# Altium PCB Race_Province.pcbdoc (part 1 of 2)
Units mil, origin at the board's own origin, x right, y up, seen from the top; angles counter-clockwise.
Board outline 6815.59 x 4255 mil, 2 copper layers (Top Layer, Bottom Layer); 128 components, 101 nets, 458 pads, 264 vias.
Unrouted connection lines stored in the file: 95.
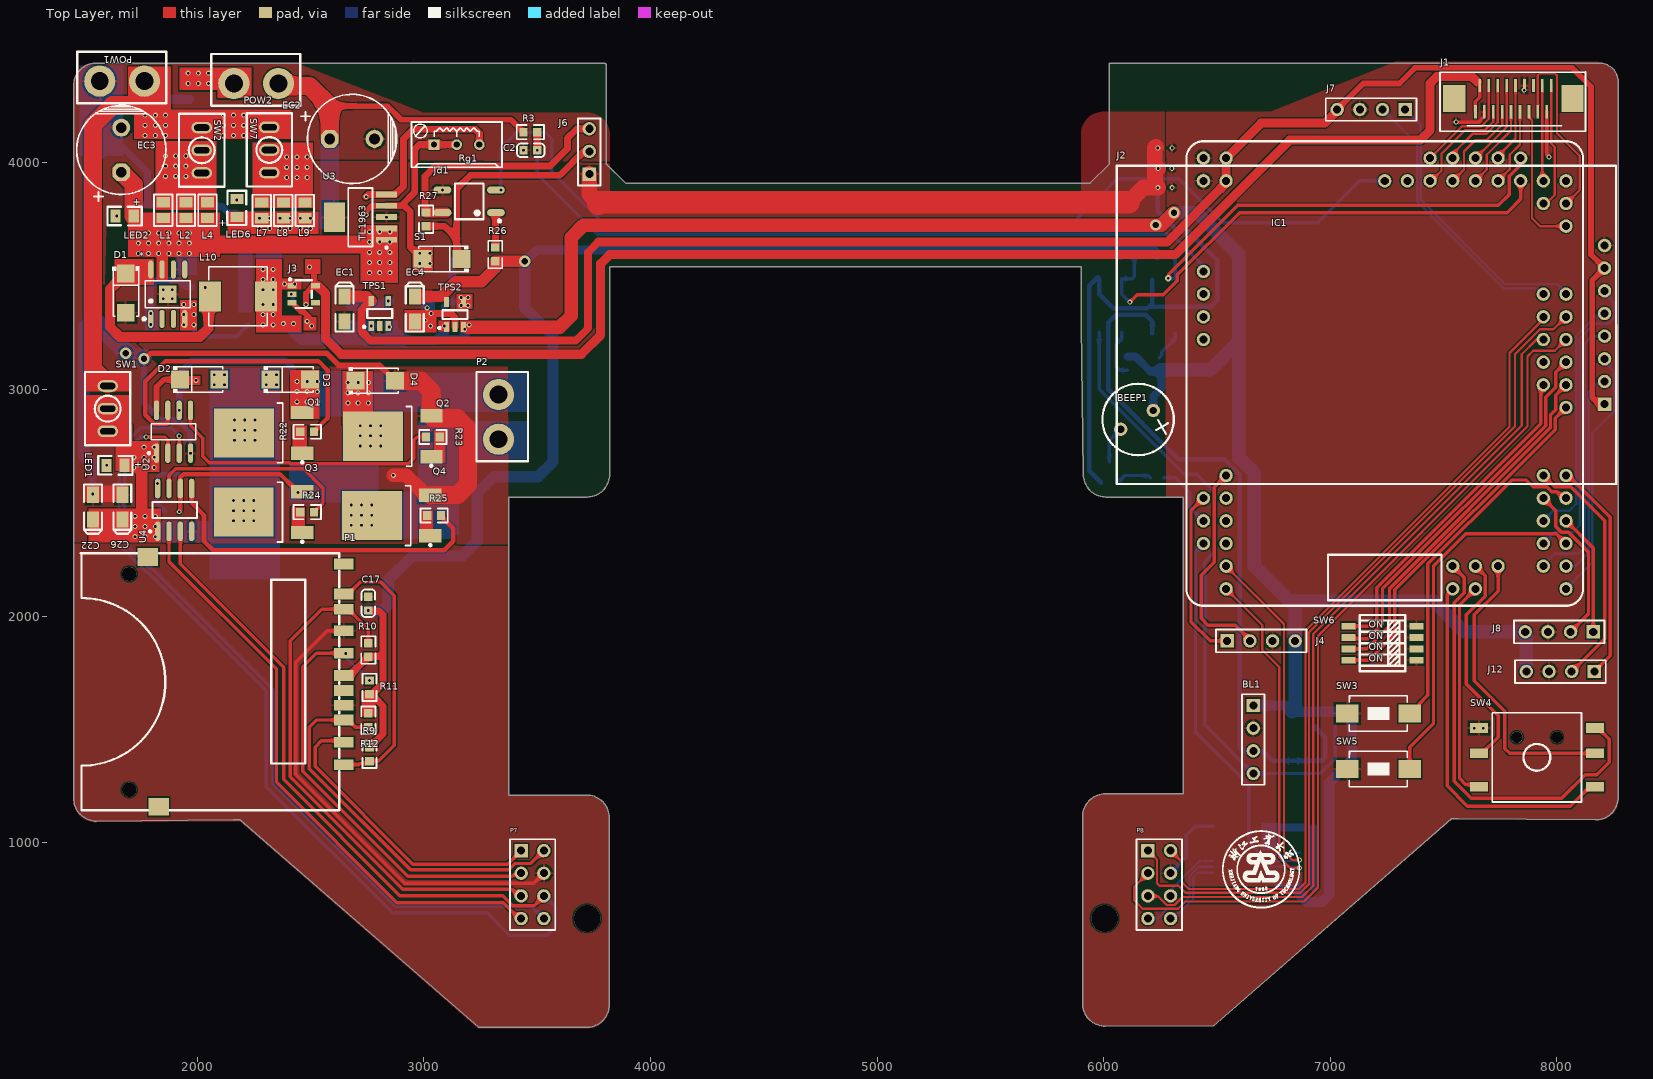
[diagram p0: Top Layer view]
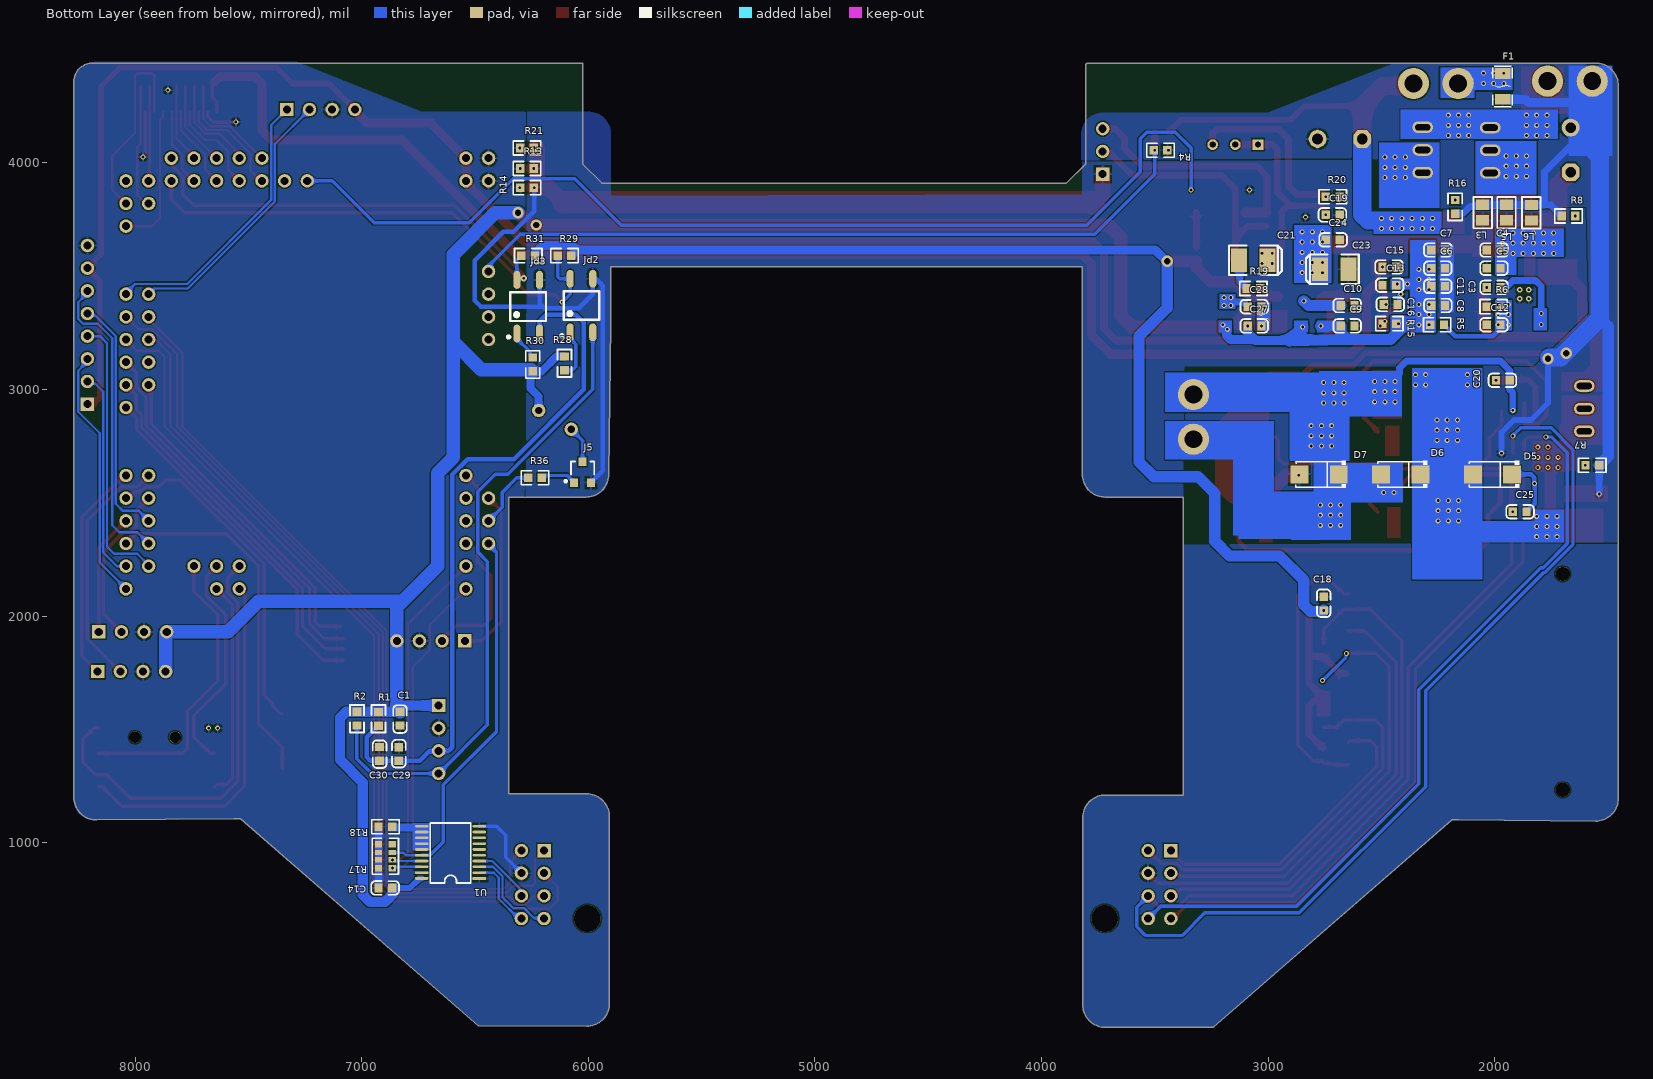
[diagram p1: Bottom Layer view, seen from below]
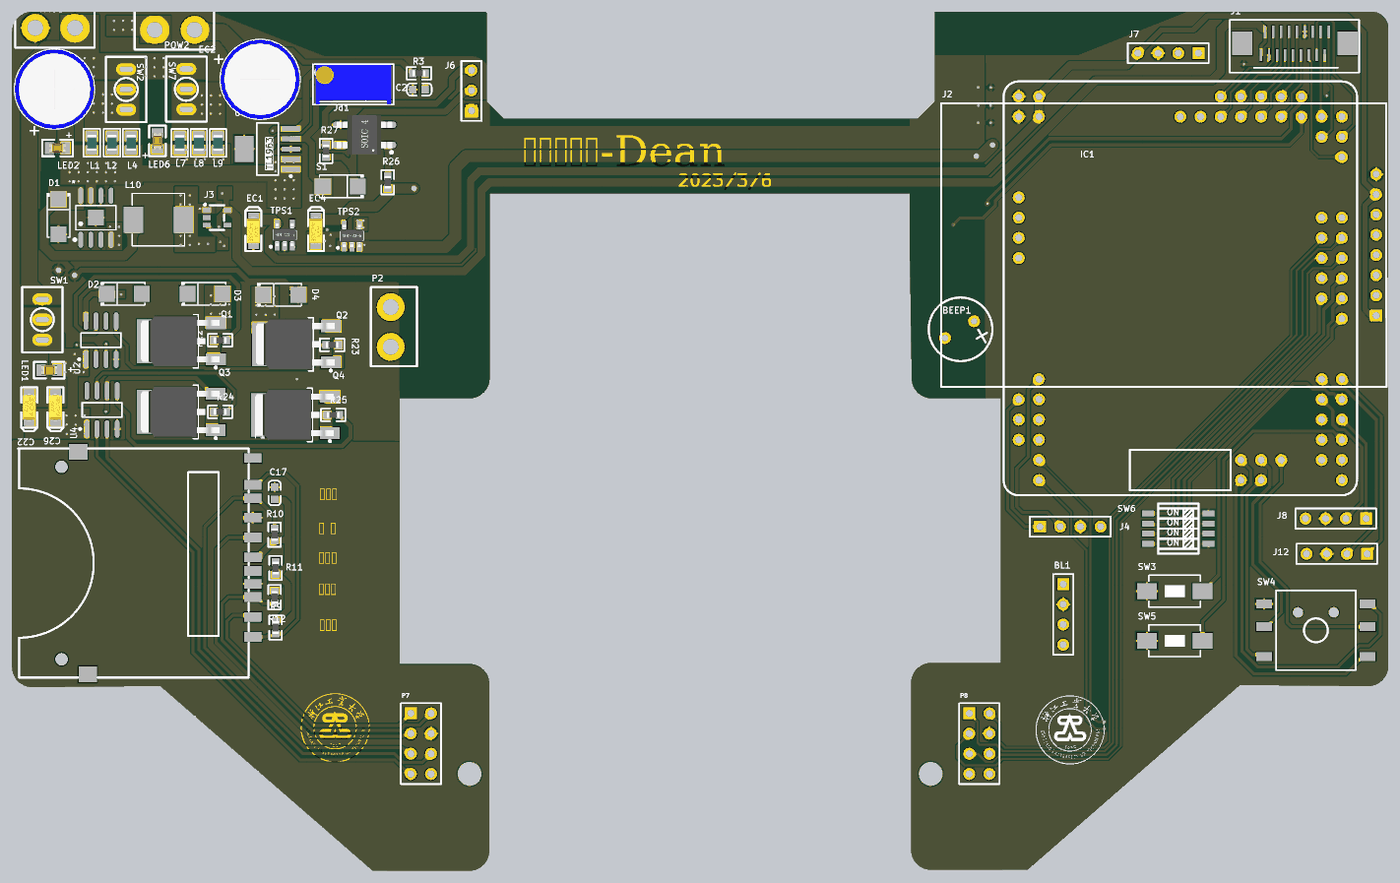
[diagram p2: 3D render of the assembled board from above, using the file's embedded part models]
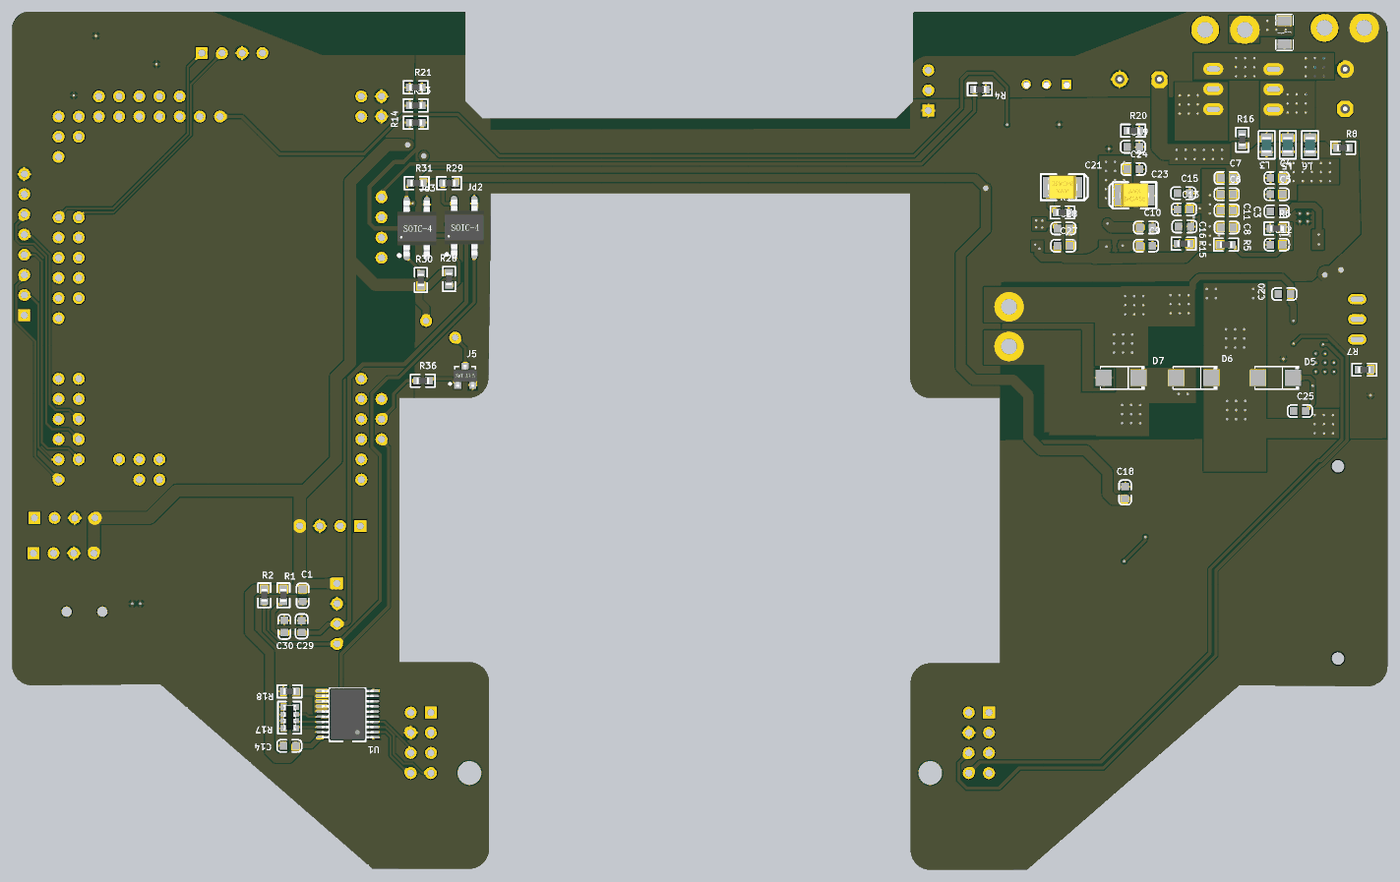
[diagram p3: 3D render of the assembled board from below, using the file's embedded part models]

## Layer stack, top to bottom
Top Solder: solder mask 0.4, Solder Resist, Dk 3.5
Top Layer: signal copper 1.4
Dielectric 1: dielectric 12.6, FR-4, Dk 4.8
Bottom Layer: signal copper 1.4
Bottom Solder: solder mask 0.4, Solder Resist, Dk 3.5

## Board outline
2160,1100 2190,1100 3240.68,186.03 3718.22,185 ccw(c3718.22,285) 3818.22,285 3818.22,1110 ccw(c3718.22,1110) 3718.22,1210 3375,1210 3375,2525 3720,2525 ccw(c3720,2625) 3820,2625 3820,3540 5900,3540 5900,3285 5910,2625 ccw(c6010,2625) 6010,2525 6350,2525 6350,1215 6006.78,1215 ccw(c6006.78,1115) 5906.78,1115 5906.78,290 ccw(c6006.78,290) 6006.78,190 6484.32,191.03 7535,1105 7565,1105 8170,1100 ccw(c8170,1200) 8270,1200 8270,4345 ccw(c8185,4355) 8195,4440 6025,4440 6025,3995 5940,3910 3890,3910 3805,3995 3805,4435 3800,4440 1555,4440 ccw(c1555,4340) 1455,4340 1455,1195 ccw(c1555,1195) 1555,1095
cut-out: 2955,4455

## Design rules (kind name [scope] priority, off if disabled: settings)
Clearance [All] p1: gap=6 ignorepadtopadclearanceinfootprint=FALSE
ComponentClearance [All] p1: gap=0 collisioncheckmode=3 verticalgap=0 showdistances=FALSE
PolygonConnect [All] p1: connectstyle=Relief reliefconductorwidth=10 reliefentries=4 polygonreliefangle="90 Angle" airgapwidth=10
RoutingVias [All] p1: holewidth=12 width=28 viastyle="Through Hole" minholewidth=10 minwidth=10 maxholewidth=200 maxwidth=200
SolderMaskExpansion [All] p1: expansion=4 istentingtop=FALSE
Width [All] p1: maxlimit=100 minlimit=10 preferedwidth=10
29 further rules are at their usual default settings.

## Classes and differential pairs
net class "New Class": DGND GND PGND
net class VCC: EN_MOTOR MOTOR_EN V-SERVO V_FUTUBA VCC3.3_all VCC3.3_ITEM VCC3.3_MCU VCC5.0-ALL VCC11.2 VCC11.2-M VCC11.2_Edge

## Components (designator, comment, footprint, x,y, rotation, side; value= is the part's Value field where it differs from the comment)
* "TPS5430DDAR" SOIC-8_L5.0-W4.0-P1.27-LS6.0-BL-EP2.0 1870,3420 r0 top
BEEP1 "BEEP" BEEP 6120,2850 r210 top
BL1 "Encoder" HDR1X4_2.54_4pin 6660,1605 r270 top
C1 "1uf" 0603_C 6830.75,1546.81 r180 bottom
C2 "100nf" 0603_C 3470.32,4055 r90 top
C3 "100nf" 0603_C 2005,3450 r90 bottom
C4 "10uf" 0603_C 2004.68,3615 r90 bottom
C5 "10uf" 0603_C 2005,3535 r90 bottom
C6 "47uf" 0603_C 2250,3535 r270 bottom
C7 "47uf" 0603_C 2249.69,3615 r270 bottom
C8 "47uf" 0603_C 2249.69,3370 r270 bottom
C9 "0.1uF（104）" 0603_C 2649.69,3280 r270 bottom
C10 "10nF" 0603_C 2649.69,3370 r270 bottom
C11 "47uf" 0603_C 2250,3455 r270 bottom
C12 "470pf" 0603_C 2005,3285 r90 bottom
C13 "1UF" 0603_C 2465,3460 r90 bottom
C14 "Cap" 0603_C 6895,800 r270 bottom value=0.1uF
C15 "1UF" 0603_C 2465.32,3540 r270 bottom
C16 "100nf" 0603_C 2459.69,3375 r270 bottom
C17 "Cap" 0603_C 2755,2055 r180 top value=0.1uF
C18 "Cap" 0603_C 2755,2055 r0 bottom value=0.1uF
C19 "104" 0603_C 2715,3770 r270 bottom
C20 "Cap" 0603_C 1964.69,3040 r270 bottom value=1.5uF
C21 "22uF" CASE-B_3528 3065,3570 r180 bottom
C22 "Cap-Pol" CAP-3216 1540,2480 r270 top value=10uF
C23 "22uF" CASE-B_3528 2707.99,3530 r0 bottom
C24 "104" 0603_C 2715,3660 r90 bottom
C25 "Cap" 0603_C 1890,2460 r90 bottom value=1.5uF
C26 "Cap-Pol" CAP-3216 1670,2480 r270 top value=10uF
C27 "0.1uF（104）" 0603_C 3060,3280 r270 bottom
C28 "10nF" 0603_C 3060,3365 r270 bottom
C29 "47pf" 0603_C 6835.75,1391.18 r0 bottom
C30 "47pf" 0603_C 6920.75,1391.81 r180 bottom
D1 "SS34" SMA_L4.3-W2.6-LS5.2-RD 1685,3425 r270 top
D2 "1N5819" SMA_L4.3-W2.6-LS5.2-RD 2010.55,3043.11 r0 top
D3 "1N5819" SMA_L4.3-W2.6-LS5.2-RD 2410.55,3043.11 r0 top
D4 "1N5819" SMA_L4.3-W2.6-LS5.2-RD 2785.55,3038.11 r0 top
D5 "1N5819" SMA_L4.3-W2.6-LS5.2-RD 2010,2625 r0 bottom
D6 "1N5819" SMA_L4.3-W2.6-LS5.2-RD 2415,2625 r0 bottom
D7 "1N5819" SMA_L4.3-W2.6-LS5.2-RD 2775,2625 r0 bottom
EC1 "10uF" CAP-3216 2650,3355 r90 top
EC2 "470uF" C-RB-5.0/10 2683.43,4105 r0 top
EC3 "470uF" C-RB-5.0/10 1665,4056.57 r90 top
EC4 "10uF" CAP-3216 2960,3355 r90 top
F1 "FUSE 2A" F1206 1965,4336.9 r90 bottom
IC1 "TC264/364" TC264 6440,4020 r0 top
J1 "MT9V032" FPC18pin-L 7812.67,4288.63 r0 top
J2 "TFT" TFT 8210,2935 r90 top
J3 "ME6211C33M5G" SOT-23-5_L3.0-W1.7-P0.95-LS2.8-BR 2470,3420 r180 top
J4 "Ultrasound" HDR1X4_2.54_4pin 6545,1890 r0 top
J5 "S8050" SOT23-3 6025,2635 r180 bottom
J6 "Direction_PWM" HDR1X3_2.54 4160,4095 r90 top
J7 "IIC" HDR1X4_2.54_4pin 7330,4235 r180 top
J8 "Ultrasound" HDR1X4_2.54_4pin 8160,1930 r180 top
J12 "Ultrasound" HDR1X4_2.54_4pin 8165,1755 r180 top
Jd1 "TL" LC-SOP-4_P2.54 3200,3830 r180 top
Jd2 "TL" LC-SOP-4_P2.54 6030,3370 r90 bottom
Jd3 "TL" LC-SOP-4_P2.54 6265,3365 r90 bottom
L1 "10uH" 0805_L 1850,3790.55 r270 top
L2 "10uH" 0805_L 1950,3790.55 r270 top
L3 "10uH" 0805_L 2053.62,3780 r90 bottom
L4 "10uH" 0805_L 2045,3790.55 r270 top
L5 "10uH" 0805_L 1948.62,3780 r90 bottom
L6 "10uH" 0805_L 1838.62,3779.45 r90 bottom
L7 "10uH" 0805_L 2285,3790 r270 top
L8 "10uH" 0805_L 2380,3790 r270 top
L9 "10uH" 0805_L 2475,3790 r270 top
L10 "10uH" IND-SMD_L7.1-W6.6 2180,3410 r180 top
LED1 "LED" 0805_LED 1679.25,2665 r180 top
LED2 "LED" 0805_LED 1720,3765 r180 top
LED6 "LED" 0805_LED 2175,3760 r90 top
P1 "Header 9H" SD-large 2155,1700 r180 top
P2 "KF/WJ/DG 30x connecter" CON2_2 3330,2885 r90 top
P7 "Header 4X2" HDR2X4_CEN_2.54mm_8pin 3429.65,965 r270 top
P8 "Header 4X2" HDR2X4_CEN_2.54mm_8pin 6195,965 r270 top (schematic designator P7)
POW1 "POWER" "CON2 - duplicate" 1668.43,4355 r0 top
POW2 "Edgeboard" "CON2 - duplicate" 2260,4345 r0 top
Q1 "IRLR7843" TO-252AA_M 2290.55,2808.11 r180 top
Q2 "IRLR7843" TO-252AA_M 2860.2,2793.11 r180 top
Q3 "IRLR7843" TO-252AA_M 2290.2,2458.11 r180 top
Q4 "IRLR7843" TO-252AA_M 2855.55,2443.11 r180 top
R1 "10k" 0603_R 6925.75,1546.49 r90 bottom
R2 "10k" 0603_R 7020.75,1546.81 r90 bottom
R3 "100k" 0603_R 3470,4135 r0 top
R4 "33K" 0603_R 3475,4055 r180 bottom
R5 "62K" 0603_R 2254.68,3285 r0 bottom
R6 "20K" 0603_R 2005,3365 r180 bottom
R7 "1K5" 0603_R 1569.57,2665 r180 bottom
R8 "1K5" 0603_R 1674.68,3765 r0 bottom
R9 "10K" 0603_R 2760,1390 r270 top
R10 "10K" 0603_R 2755,1850 r90 top
R11 "10K" 0603_R 2760,1685 r90 top
R12 "10K" 0603_R 2755,1540 r270 top
R13 "0K" 0603_R 6270.31,3975 r0 bottom
R14 "0K" 0603_R 6270.31,3890 r0 bottom
R15 "1K" 0603_R 2465,3290 r0 bottom
R16 "1K5" 0603_R 2175,3805 r270 bottom
R17 "Res Pack" LC-0603_Rx4 6895,940 r90 bottom value=1K
R18 "4K7" 0603_R 6895,1070 r0 bottom
R19 "1" 0603_R 3065,3445 r180 bottom
R20 "1k" 0603_R 2715,3850 r180 bottom
R21 "0K" 0603_R 6270.31,4065 r0 bottom
R22 "Res1" 0603_R 2485.24,2813.11 r0 top value=20R
R23 "Res1" 0603_R 3040,2790 r180 top value=20R
R24 "Res1" 0603_R 2485.24,2458.11 r0 top value=20R
R25 "Res1" 0603_R 3045.24,2443.11 r0 top value=20R
R26 "100" 0603_R 3315,3595.32 r270 top
R27 "2k" 0603_R 3010,3750.32 r270 top
R28 "180" 0603_R 6105,3115 r90 bottom
R29 "2k" 0603_R 6105,3590 r180 bottom
R30 "180" 0603_R 6245,3110 r270 bottom
R31 "2k" 0603_R 6265,3590 r180 bottom
R36 "4K7" 0603_R 6235,2610 r0 bottom
Rg1 "10k" "VR-3296W - duplicate" 3145,4080 r0 top
S1 "1N5819" SMA_L4.3-W2.6-LS5.2-RD 3080,3575 r180 top
SW1 "SW" 钮子开关-小 1606.89,2908.58 r0 top
SW2 "SW" 钮子开关-小 2018.11,4061.42 r180 top
SW3 "SW_PB" SW_PB 7210,1570 r270 top
SW4 "KEY_5" KEY_5 7655.51,1506.34 r0 top
SW5 "SW_PB" SW_PB 7210,1325 r270 top
SW6 "SW_DIP_4" SW-SMD_8P-L6.3-W4.5-P1.27-LS8.1 7230,1880 r90 top
SW7 "SW" 钮子开关-小 2320,4050 r0 top
TPS1 "TPS73633" SOT-23-5 2805,3335 r270 top
TPS2 "TPS73633" SOT-23-5 3137.4,3329.88 r270 top
U1 "74HC245" TSSOP20 6480.91,842.05 r0 bottom
U2 "IR2104S" SO-8_N 1895.55,2813.11 r90 top
U3 "TL1963" TL1963 2715,3740 r270 top
U4 "IR2104S" SO-8_N 1900.55,2468.11 r90 top

## Footprints (in the part's own frame and the unit in brackets; to place one, negate y for a bottom-side part, rotate by r counter-clockwise, add the part's x,y. Pads: shape width x height; smd on the part's side, far side on the other; paste and mask are expansions set on the pad)
0603_C [mm]
  rect 0.98x0.93 smd: 1(0,-0.77) 2(0,0.77)
  silkscreen extent -0.76,-1.59 0.76,1.51
0603_R [mm]
  rect 0.93x0.98 smd: 1(-0.77,0) 2(0.77,0)
  silkscreen extent -1.54,-0.79 1.54,0.79, body extent -0.8,-0.4 0.8,0.4, height 0.38
0805_L [mm]
  rect 1.16x1.47 smd: 1(-0.875,0) 2(0.875,0)
  silkscreen extent -1.76,-1.04 1.76,1.03, body extent -1,-0.6 1,0.6, height 0.95
0805_LED [mil] "1/8W"
  rect 45x58 smd: 1(0,0) 2(80,0.2)
  silkscreen extent -35,-41 116,42, body extent 0,-25 80,25, height 43
BEEP [mm]
  round 1.5 hole 0.8: 1(-2.896,0) 2(1.318,0)
  silkscreen extent -4.91,-3.97 3.09,4.03
C-RB-5.0/10 [mm] "插件电解电容"
  oct 2x2 hole 1.2: 1(-2.5,0)
  round 2 hole 1.2: 2(2.5,0)
  silkscreen extent -5.71,-5 5,5, body extent -5.03,-5.03 5.03,5.03, height 13.03
CAP-3216 [mm]
  rect 1.8x1.35 smd: 1(1.4,0) 2(-1.4,0)
  silkscreen extent -2.54,-1 2.97,1, body extent -1.7,-0.84 1.7,0.84, height 1.71
CASE-B_3528 [mm]
  rect 1.8x2.6 smd: 1(1.6,0) 2(-1.6,0)
  silkscreen extent -2.73,-1.65 3.16,1.65, body extent -1.85,-1.47 1.85,1.46, height 2.03
"CON2 - duplicate" [mm]
  round 3.5 hole 2: 1(-2.5,0.127) 2(2.5,0.127)
  silkscreen extent -5.03,-2.36 4.95,3.43
CON2_2 [mm]
  round 3.5 hole 2: 1(2.333,0) 2(-2.667,0)
  silkscreen extent -5.12,-3.3 4.86,2.49
F1206 [mil]
  rect 46.9x68 smd mask+2: 1(-56.9,0) 2(56.9,0)
  silkscreen extent -89,-43 89,43
FPC18pin-L [mm] "立式"
  rect 2.5x3 smd: 0(-6.764,-0.143) 0(6.494,-0.143)
  rect 0.305x1.5 smd: 1(4.115,1.33) 2(3.615,-1.616) 3(3.115,1.33) 4(2.615,-1.616) 5(2.115,1.33) 6(1.615,-1.616) 7(1.115,1.33) 8(0.615,-1.616) 9(0.115,1.33) 10(-0.385,-1.616) 11(-0.885,1.33) 12(-1.385,-1.616) 13(-1.885,1.33) 14(-2.385,-1.616) 15(-2.885,1.33) 16(-3.385,-1.616) 17(-3.885,1.33) 18(-4.385,-1.616)
  silkscreen extent -8.34,-3.8 7.94,2.83
HDR1X3_2.54 [mm]
  rect 1.5x1.5 hole 0.9: 1(-3.683,10.922)
  round 1.5 hole 0.9: 2(-1.143,10.922) 3(1.397,10.922)
  silkscreen extent -4.95,9.65 2.54,12.19
HDR1X4_2.54_4pin [mm] "4pin"
  rect 1.5x1.5 hole 0.9: 1(0,0)
  round 1.5 hole 0.9: 2(2.54,0) 3(5.08,0) 4(7.62,0)
  silkscreen extent -1.27,-1.27 8.89,1.27
HDR2X4_CEN_2.54mm_8pin [mm] "蓝牙"
  rect 1.5x1.5 hole 0.9: 1(0,0)
  round 1.5 hole 0.9: 2(2.54,0) 3(5.08,0) 4(7.62,0) 5(0,2.54) 6(2.54,2.54) 7(5.08,2.54) 8(7.62,2.54)
  silkscreen extent -1.27,-1.27 8.89,3.81
IND-SMD_L7.1-W6.6 [mm]
  rect 2.474x3.32 smd mask+0.051: 1(3.153,0) 2(-3.153,0)
  silkscreen extent -3.3,-3.3 3.3,3.3
KEY_5 [mm] "五向导航按键"
  round 1.3 hole 1.3: 0(4.25,-1.05) 0(8.75,-1.05)
  rect 2x1.1 smd: 1(0,0) 2(0,-2.85) 3(0,-6.6) 4(13,0) 5(13,-2.85) 6(13,-6.6)
  silkscreen extent 1.5,-8.3 11.5,1.7
LC-0603_Rx4 [mm]
  rect 0.75x0.8 smd mask+0.051: 1(-1.35,-0.77) 4(1.35,-0.77) 5(1.35,0.77) 8(-1.35,0.77)
  rect 0.58x0.8 smd mask+0.051: 2(-0.4,-0.77) 3(0.4,-0.77) 6(0.4,0.77) 7(-0.4,0.77)
  silkscreen extent -2.02,-1.47 2.02,1.47, body extent -1.6,-0.8 1.6,0.8, height 0.55
LC-SOP-4_P2.54 [mm]
  oval 2x0.8 smd: 1(-3,1.27) 2(-3,-1.27) 3(3,-1.27) 4(3,1.27)
  silkscreen extent -3.55,-2 1.6,2.35, body extent -3.5,-2.45 3.5,2.45, height 2.9
SD-large [mm]
  rect 2.2x1.2 smd: 1(-12.495,6.541) 2(-12.495,4.04) 3(-12.495,2.389) 4(-12.495,-0.961) 5(-12.495,-3.459) 6(-12.495,-5.96) 7(-12.495,-8.389) 8(-12.495,9.039) 9(-12.495,-10.09) ""(-12.495,0.741) ""(-12.495,-13.439)
  rect 2.3x2 smd: ""(8.254,13.76) ""(9.455,-14.24)
  round 1.6 hole 1.6 unplated: ""(11.556,-12.34) ""(11.556,11.86)
  silkscreen extent -12,-14.64 17.02,14.16
SMA_L4.3-W2.6-LS5.2-RD [mm]
  rect 2x2 smd mask+0.051: 1(-2.2,0) 2(2.2,0)
  silkscreen extent -2.98,-1.5 2.6,1.5
SO-8_N [mm] "SOIC, 8-Leads, Body 4.9x3.9mm, Pitch 1.27mm, IPC Medium Density"
  oval 2.2x0.6 smd: 1(-2.4,1.905) 2(-2.4,0.635) 3(-2.4,-0.635) 4(-2.4,-1.905) 5(2.4,-1.905) 6(2.4,-0.635) 7(2.4,0.635) 8(2.4,1.905)
  silkscreen extent -2.52,-2.5 0.9,2.88, body extent -1.95,-2.45 1.95,2.45, height 1.75
SOIC-8_L5.0-W4.0-P1.27-LS6.0-BL-EP2.0 [mil]
  oval 22.6x80.2 smd mask+2: 1(-75,-109) 2(-25,-109) 3(25,-109) 4(75,-109) 5(75,109) 6(25,109) 7(-25,109) 8(-75,109)
  rect 78.7x78.7 smd mask+2: 9(0,0)
  silkscreen extent -110,-115 100,60
SOT23-3 [mm] "S8050_晶体管"
  rect 0.9x0.95 smd: 1(-0.95,-1.175) 2(0.95,-1.175) 3(0,1.175)
  silkscreen extent -2.03,-1.14 1.3,1.18, body extent -1.45,-1.4 1.45,1.4, height 1.2
SOT-23-5 [mm]
  rect 1.1x0.6 smd: 1(1.4,-0.95) 2(1.4,0) 3(1.4,0.95) 4(-1.4,0.95) 5(-1.4,-0.95)
  silkscreen extent -0.5,-1.87 1.62,1.4, body extent -1.4,-1.45 1.4,1.45, height 1.2
SOT-23-5_L3.0-W1.7-P0.95-LS2.8-BR [mm]
  rect 1x0.6 smd mask+0.051: 1(1.3,-0.95) 2(1.3,0) 3(1.3,0.95) 4(-1.3,0.95) 5(-1.3,-0.95)
  silkscreen extent -0.9,-1.78 1.65,1.55
SW-SMD_8P-L6.3-W4.5-P1.27-LS8.1 [mil]
  rect 30x60 smd mask+2: 1(-75,-150) 2(-25,-150) 3(25,-150) 4(75,-150) 5(75,150) 6(25,150) 7(-25,150) 8(-75,150)
  silkscreen extent -124,-100 124,100
SW_PB [mm] "按键"
  rect 2x2.5 smd: 1(0,3.556) 2(0,-3.444)
  silkscreen extent -2,-3.19 2,3.31, body extent -1.93,-3.94 1.92,3.95, height 2.5
TC264 [mm] "TC264核心板"
  round 1.5 hole 0.9: 1(0,0) 2(2.54,0) 3(0,-2.54) 4(2.54,-2.54) 11(0,-12.7) 13(0,-15.24) 15(0,-17.78) 17(0,-20.32) 30(2.54,-35.56) 31(0,-38.1) 32(2.54,-38.1) 33(0,-40.64) 34(2.54,-40.64) 35(0,-43.18) 36(2.54,-43.18) 38(2.54,-45.72) 40(2.54,-48.26) 49(27.94,-45.72) 50(27.94,-48.26) 51(30.48,-45.72) 52(30.48,-48.26) 53(33.02,-45.72) 58(40.64,-48.26) 59(38.1,-45.72) 60(40.64,-45.72) 61(38.1,-43.18) 62(40.64,-43.18) 63(38.1,-40.64) 64(40.64,-40.64) 65(38.1,-38.1) 66(40.64,-38.1) 67(38.1,-35.56) 68(40.64,-35.56) 74(40.64,-27.94) 75(38.1,-25.4) 76(40.64,-25.4) 77(38.1,-22.86) 78(40.64,-22.86) 79(38.1,-20.32) 80(40.64,-20.32) 81(38.1,-17.78) 82(40.64,-17.78) 83(38.1,-15.24) 84(40.64,-15.24) 90(40.64,-7.62) 91(38.1,-5.08) 92(40.64,-5.08) 93(38.1,-2.54) 94(40.64,-2.54) 97(35.56,-2.54) 98(35.56,0) 99(33.02,-2.54) 100(33.02,0) 101(30.48,-2.54) 102(30.48,0) 103(27.94,-2.54) 104(27.94,0) 105(25.4,-2.54) 106(25.4,0) 107(22.86,-2.54) 109(20.32,-2.54)
  silkscreen extent -1.91,-50.16 42.55,1.91
TFT [mm] "4pin"
  rect 1.5x1.5 hole 0.9: 1(0,0)
  round 1.5 hole 0.9: 2(2.54,0) 3(5.08,0) 4(7.62,0) 5(10.16,0) 6(12.7,0) 7(15.24,0) 8(17.78,0)
  silkscreen extent -8.97,-1.3 26.72,54.69
TL1963 [mm]
  rect 0.65x2.35 smd: 1(2.032,3.052) 2(0.762,3.052) 3(-0.508,3.052) 4(-1.778,3.052) 5(-3.048,3.052)
  rect 3.3x2.35 smd: 6(-0.508,-2.798)
  silkscreen extent -3.78,-1.22 3.03,3.18, body extent -3.78,-1.65 2.77,1.9, height 1.8
TO-252AA_M [mm] "D-PAK, 4-Leads, Body 6.1x6.5mm, Pitch 2.28mm, Lead Span 9.8mm, IPC Low Density"
  rect 2.5x1.5 smd: 1(-4.4,2.28) 3(-4.4,-2.28)
  rect 6.7x5.5 smd: 4(2.15,0)
  silkscreen extent -4.52,-3.35 -1.6,3.43, body extent -4.9,-3.27 5.04,3.27, height 2.39
TSSOP20 [mm] "74HC245"
  rect 1.5x0.3 smd: 1(0,0)
  oval 1.5x0.3 smd: 2(0,-0.65) 3(0,-1.3) 4(0,-1.95) 5(0,-2.6) 6(0,-3.25) 7(0,-3.9) 8(0,-4.55) 9(0,-5.2) 10(0,-5.85) 11(6.454,-5.85) 12(6.454,-5.2) 13(6.454,-4.55) 14(6.454,-3.9) 15(6.454,-3.25) 16(6.454,-2.6) 17(6.454,-1.95) 18(6.454,-1.3) 19(6.454,-0.65) 20(6.454,0)
  silkscreen extent 0.97,-6.2 5.49,0.51, body extent -0.05,-6.22 6.5,0.38, height 1.2
"VR-3296W - duplicate" [mm] "Potentiometer; 3 Leads"
  rect 1.2x1.2 hole 0.7: 1(-2.54,0)
  round 1.2 hole 0.7: 2(0,0) 3(2.54,0)
  silkscreen extent -5.08,-2.54 5.08,2.54, body extent -4.75,-2.54 4.75,2.46, height 11.5
钮子开关-小 [mm]
  oval 2.3x1.3 hole 0.7 slot 1.7 at 0 deg: 1(-0.048,-2.377) 2(-0.048,0.163) 3(-0.048,2.703)
  silkscreen extent -2.59,-3.94 2.49,4.26

## Part data
BEEP1: "有源5v蜂鸣器"
BL1: "编码器"
C1 C4 C5 C6 C7 C8 C9 C10 C11 C12 C13 C15 C16 C27 C28 C29 C30: library part CAP, "电容"
C2 C3: library part CAP, "0805"
C14 C17 C18 C20 C25: "Capacitor", LatestRevisionDate=17-Jul-2002, LatestRevisionNote="Re-released for DXP Platform.", PackageDescription="Radial Cap, Thru-Hole; 2 Leads; 0.3 in Pin Spacing", PackageReference=RAD-0.3, Published=8-Jun-2000, Publisher="Altium Limited"
C19 C24: library part Cap, "Capacitor", LatestRevisionDate=17-Jul-2002, LatestRevisionNote="Re-released for DXP Platform.", Published=8-Jun-2000, Publisher="Altium Limited"
C21 C23: library part ELECTRO2_1, "Electrolytic Capacitor"
C22 C26: library part Cap-Pol-A, "钽电容", LatestRevisionDate=17-Jul-2002, LatestRevisionNote="Re-released for DXP Platform.", PackageReference=RB7.6-15, Published=8-Jun-2000, Publisher="Altium Limited"
D1: library part 1N5819, "1N5819 二极管 Diode", Imax=500mA, Price(RMB)=0.000, Published=8-Jun-2000, Publisher="Altium Limited", Revision="July-2002: Re-released for DXP Platform."
D2 D3 D4 D5 D6 D7: library part "D Schottky", "Schottky Diode", Code_JEDEC=DO-214-AA, LatestRevisionDate=17-Jul-2002, LatestRevisionNote="Re-released for DXP Platform.", PackageDescription="DO-214-AA/SMB; 2 C-Bend Leads; Body 5.3 x 3.6 mm, inc. leads (LxW)", PackageReference=SMB, Published=8-Jun-2000, Publisher="Altium Limited"
EC1 EC4: library part CAP_E, "极性电容"
EC2 EC3: library part CAP_E, "电解电容"
F1: library part "FUSE 2a 12v"
IC1: library part TC264, "英飞凌TC264"
J1: "总钻风摄像头"
J2: "1.8寸显示屏"
J3: library part Direction_PWM
J4 J8 J12: library part URAT, "超声波"
J5: "贴片三极管"
J7: library part URAT, "串口排针"
Jd1 Jd2 Jd3: library part TLP281, "光耦", DatasheetDocument=Nov-2003, LatestRevisionDate=04-Mar-2005, LatestRevisionNote="Sch pins 3 & 4 Swapped.", PackageReference=DIP-4, Published=24-Mar-1999, Publisher="Altium Limited"
L1 L2 L3 L4 L5 L6 L7 L8 L9 L10: library part IND, "电感"
LED1 LED2 LED6: "发光二极管"
P1: "Header, 9-Pin, Right Angle", LatestRevisionDate=17-Jul-2002, LatestRevisionNote="Re-released for DXP Platform.", Publisher="Altium Limited"
P2: library part "KF/WJ/DG 30x", "接线端子 2Pin"
P7 P8: "Header, 4-Pin, Dual row", LatestRevisionDate=17-Jul-2002, LatestRevisionNote="Re-released for DXP Platform.", Publisher="Altium Limited"
POW1: "电源"
POW2: library part POWER, "电源"
Q1 Q2 Q3 Q4: library part IRLR8503, "HEXFET Power MOSFET", Code_JEDEC=TO-252-AA, ComponentLink1Description="Manufacturer Link", ComponentLink1URL=http://www.irf.com/, ComponentLink2Description=Datasheet, ComponentLink2URL=http://www.irf.com/product-info/datasheets/data/IRLR8503.pdf, DatasheetVersion=21-Dec-2000, LatestRevisionDate=20-Nov-2009, LatestRevisionNote="IPC-7351 Footprint Added.", Note="Pin 2 is trimmed and not drawn", PackageDescription="3-Pin HEXFET Package 2.28 mm Pitch, 9.9 mm Lead Span", PackageReference=TO-252AA, PackageVersion=Feb-2003, Published=17-Sep-2003, Publisher="Altium Limited"
R1 R2 R3 R4 R5 R6 R7 R8 R13 R14 R15 R16 R18 R19 R20 R21 R26 R27 R28 R29 R30 R31 R36: library part RES, "电阻"
R9 R10 R11 R12: library part R
R17: "Isolated Resistor Network", Code_IPC=SOIC127P600-16, Code_JEDEC=MS-012-AC, LatestRevisionDate=29-May-2009, LatestRevisionNote="IPC-7351 Footprint Added.", PackageDescription="16-Pin Small Outline Integrated Circuit 1.27 mm Pitch", PackageReference=SO-16, Published=24-Mar-1999, Publisher="Altium Limited"
R22 R23 R24 R25: "Resistor", LatestRevisionDate=17-Jul-2002, LatestRevisionNote="Re-released for DXP Platform.", PackageDescription="Axial Device, Thru-Hole; 2 Leads; 0.3 in Pin Spacing", PackageReference=AXIAL-0.3, Published=8-Jun-2000, Publisher="Altium Limited"
Rg1: library part changabelRES
S1: "肖基特二极管"
SW1 SW2 SW7: "钮子开关"
SW3 SW5: "两脚贴片微动开关"
SW4: "五向导航按钮"
SW6: "4位拨码开关"
TPS1 TPS2: "线性稳压器"
U1: library part SN74LVC245DW, "Octal Bus Transceiver with 3-State Outputs", Code_IPC=SOIC127P1030-20, Code_JEDEC=MS-013, ComponentAvailability=Obsolete, ComponentLink1Description="Manufacturer Link", ComponentLink1URL=http://www.ti.com/, ComponentLink2Description="URL Link1", ComponentLink2URL=http://focus.ti.com/docs/prod/folders/print/sn74lvc245.html, DatasheetVersion=Jul-1994, LatestRevisionDate=13-Apr-2006, LatestRevisionNote="IPC-7351 Footprint Added.", PackageDescription="20-Pin Plastic Small Outline Integrated Circuit 1.27 mm Pitch", PackageReference=DW020, PackageVersion=Mar-2000, Published=8-Jun-2000, Publisher="Altium Limited"
U2 U4: "High and Low Side Driver", Code_IPC=SOIC127P600-8, Code_JEDEC=MS-012-AA, ComponentLink1Description="Manufacturer Link", ComponentLink1URL=http://www.irf.com/, ComponentLink2Description=Datasheet, ComponentLink2URL=http://www.irf.com/product-info/datasheets/data/ir2104.pdf, DatasheetVersion=PD600461, LatestRevisionDate=13-Apr-2006, LatestRevisionNote="IPC-7351 Footprint Added.", PackageDescription="8-Pin Plastic Small Outline Integrated Circuit 1.27 mm Pitch", PackageReference=SO-8, PackageVersion=Feb-2001, Published=8-Jun-2000, Publisher="Altium Limited"

## Via types
v1: diameter 22, hole 12, Top Layer to Bottom Layer, tented both sides, 252 vias
v2: diameter 50, hole 28, Top Layer to Bottom Layer, tented both sides, 5 vias
v3: diameter 24, hole 12, Top Layer to Bottom Layer, 4 vias
v4: diameter 118.11, hole 118.11, Top Layer to Bottom Layer, tented both sides, 2 vias
v5: diameter 28, hole 12, Top Layer to Bottom Layer, tented both sides, 1 vias

## Nets (pads, with @x,y where several pads share a name; then routed paths per layer and width w, separated by ;. In a path a pad name is that pad's centre, name@x,y a point inside that pad or via, vN(x,y) a via of type N, cw(c..) or ccw(c..) an arc to the next point about the centre after c; other vN are vias at no path point)
02.6: IC1.98 Jd3.4 R31.1 | length 1995.7
  Top Layer w15: v5(6285,3490) 6287.49,3492.49 6287.49,3507.49 6591.82,3811.82 7741.82,3811.82 7790,3860 7790,3940 7831.57,3981.57 7831.57,4011.57 IC1.98
  Bottom Layer w15: v5(6285,3490) 6308.11,3490 Jd3.4 6315,3570.31 R31.1
02.7: IC1.97 Jd2.4 R29.1 | length 2277.8
  Top Layer w15: v1(6115,3385) 6148.17,3418.17 6263.17,3418.17 6325,3480 6325,3505 6600,3780 7780,3780 7840,3840 IC1.97
  Bottom Layer w15: v1(6115,3385) 6080,3420 Jd2.4 6126.53,3488.11 6135.31,3496.9 R29.1
11.2: IC1.78 SW6.6 | length 1667.4
  Top Layer w15: SW6.6@7080,1900 7165,1900 7230,1965 7230,2120 7950,2840 7950,2965 7995,3010 7995,3075 IC1.78
11.3: IC1.79 P1.7 P7.3 P8.3 R10.2 | length 5968
  Top Layer w10: P8.3 6196.84,763.16 6239.53,763.16 6278.21,724.47 6311.79,724.47 6347.31,760 6435,760 6875,760 6925,810 6925,1920.5 7845,2840.5 7845,3155 7910,3220 IC1.79
  Top Layer w15: R10.2 2755,1941.89 2666.62,2030.27 P1.7 2550.27,2030.27 2410,1890 2410,1291.01 2906.01,795 3387.72,795 3417.72,765 P7.3
11.6: IC1.80 P1.5 P7.2 P8.2 R11.2 | length 5931.2
  Top Layer w10: P8.2 6135,805 6135,745 6171.53,708.47 6328.47,708.47 6360,740 6435,740 6883.28,740 6945,801.72 6945,1912.22 7870,2837.22 7870,3145 7895,3170 7990,3170 8035,3215 8035,3220 IC1.80
  Top Layer w15: P1.5 2526.18,1836.18 2466,1776 2466,1314.21 2929.21,851 3389,851 3394.57,856.57 3421.22,856.57 P7.2
  Bottom Layer w15: v1(2655,1835) 2656.34,1833.66 2656.34,1818.98 v1(2760,1715.32)
11.9: IC1.81 P1.2 P7.5 P8.5 R12.2 | length 5385
  Top Layer w10: P8.5 6345,915 6345,825 6375,795 6435,795 6860.5,795 6890,824.5 6890,1935 7790,2835 7790,3160 7940,3310 IC1.81
  Top Layer w15: R12.2 2697.88,1509.68 2666.62,1540.94 P1.2 2525.94,1540.94 2495,1510 2495,1326.22 2941.22,880 3374.34,880 3402.37,908.03 3472.67,908.03 P7.5
11.10: IC1.82 P1.1 P7.1 P8.1 | length 5212.4
  Top Layer w10: P8.1 6235.53,924.47 6235.53,820.33 6245.86,810 6330,810 6361,779 6435,779 6867.13,779 6906,817.87 6906,1928.37 7815,2837.37 7815,3155 7925,3265 7985,3265 IC1.82
  Top Layer w15: P1.1 2639.41,1450 2548.16,1450 2520,1421.84 2520,1336.58 2951.58,905 3369.65,905 P7.1
13.0: IC1.74 SW6.8 | length 1565.4
  Top Layer w15: SW6.8 7170,1805 7285,1920 7285,2115.3 7992.21,2822.51 7992.21,2872.21 IC1.74
13.1: IC1.75 SW6.5 | length 1468.9
  Top Layer w15: SW6.5@7093.8,1955 7185,1955 7205,1975 7205,2125 7928.79,2848.79 7928.79,3008.79 IC1.75
13.2: IC1.76 SW6.7 | length 1609.5
  Top Layer w15: SW6.7 7160,1855 7260,1955 7260,1965.3 7261,1966.3 7261,2121 7971.21,2831.21 7971.21,2886.21 7995,2910 7995,2975 IC1.76
20.6: IC1.49 SW4.4 | length 1959.5
  Top Layer w15: IC1.49 7590,2170 7590,2103 7546,2059 7546,1270.89 7621.89,1195 8020,1195 8125,1300 8175,1300 8230,1355 8230,1456.38 8180.04,1506.34 SW4.4@8162.32,1506.34
20.7: IC1.50 SW4.6 | length 1600.8
  Top Layer w15: IC1.50 7540,2116.42 7515,2091.42 7515,1250 7605,1160 8058.11,1160 8144.61,1246.5 SW4.6@8162.32,1246.5
20.8: IC1.51 SW4.2 | length 983.5
  Top Layer w15: IC1.51 7683.03,2176.97 7683.03,2088.03 7600,2005 7600,1700 7740,1560 7740,1465.91 7668.23,1394.13 SW4.2@7650.51,1394.13
20.9: IC1.52 SW4.3 | length 961.2
  Top Layer w15: IC1.52 7570,2050 7570,1283.79 7597.43,1256.36 7640.65,1256.36 SW4.3@7650.51,1246.5
20.10: IC1.53 SW4.5 | length 1305.4
  Top Layer w15: IC1.53 7740,2110 7635,2005 7635,1715 7770,1580 7770,1415 7790.87,1394.13 SW4.5@8162.32,1394.13
A11: C2.1 IC1.11 R3.2 R4.1 | length 3317.6
  Top Layer w30: R3.2 3500.47,4134.84 3500.47,4055.16 v1(3500.63,4055)
  Bottom Layer w15: v1(3500.63,4055) 3500.63,3949.37 3765,3685 6300,3685 6440,3545 IC1.11
BEEP: IC1.33 R36.2 | length 291.5
  Bottom Layer w15: R36.2 6315,2610 6380,2545 6380,2480 IC1.33
C_D0: IC1.99 J1.8 | length 345.1
  Top Layer w10: IC1.99 7791.89,3971.89 7791.89,4035 7836.89,4080 J1.8
C_D1: IC1.100 J1.9 | length 353
  Top Layer w10: IC1.100 7740,4030 7817.2,4107.2 J1.9
C_D2: IC1.101 J1.10 | length 370.2
  Top Layer w10: IC1.101 7690,3970 7690,4035 7797.52,4142.52 J1.10
C_D3: IC1.102 J1.11 | length 378.1
  Top Layer w10: IC1.102 7777.83,4157.83 J1.11
C_D4: IC1.103 J1.12 | length 424.6
  Top Layer w10: IC1.103 7590,3970 7590,4050 7640,4100 7690,4100 7758.15,4168.15 J1.12
C_D5: IC1.104 J1.13 | length 438.4
  Top Layer w10: IC1.104 7540,4040 7627.39,4127.39 7687.39,4127.39 7738.46,4178.46 J1.13
C_D6: IC1.105 J1.14 | length 474.6
  Top Layer w10: IC1.105 7445,3920 7490,3965 7490,4040 7595,4145 7682.37,4145 7718.78,4181.41 J1.14
C_D7: IC1.106 J1.15 | length 478.4
  Top Layer w10: IC1.106 7581,4161 7666.49,4161 7699.09,4193.6 J1.15
C_PCLK: IC1.91 J1.1 | length 555
  Top Layer w10: IC1.91 7951.92,3820 7990,3858.08 7990,4070 7974.69,4085.31 J1.1
C_RX: IC1.92 J1.4 | length 884.3
  Top Layer w10: J1.4 7915.63,4385.63 7925,4395 7990,4395 8000,4385 8000,4130 8100,4030 8100,3880 IC1.92
C_TX: IC1.93 J1.3 | length 422.9
  Top Layer w10: J1.3 7935.31,3924.69 IC1.93
C_VSY: IC1.90 J1.6 | length 640.2
  Top Layer w10: J1.6 7876.26,4201.47 7890,4187.73 7890,3755 7925,3720 IC1.90
DGND: BL1.2 C1.1 C14.1 C17.1 C18.1 C29.1 C30.2 IC1.1 IC1.3 J1.2 J1.7 J1.16 J2.8 J4.3 J7.3 J8.3 J12.3 P1.3 P1.6 P7.6 P8.6 R13.2 R14.2 R17.5 R17.6 R17.7 R17.8 R18.2 R21.2 SW3.2 SW4.1 SW5.2 SW6.1 SW6.2 SW6.3 SW6.4 U1.1 U1.10 U1.19 | length 3034.6
  Top Layer w15: P1.6 2574.64,1934.64 2435,1795 2435,1301.37 2916.37,820 3484.65,820 P7.6 ; v1(7555,4180) 7555.5,4179.5 7654.44,4179.5 7679.41,4204.47 J1.16 ; J1.2 7955,4035 v1(7965,4025)
  Bottom Layer w15: P8.6 6365,935 6365,1032.36 6405,1072.36 U1.10
  Bottom Layer w30: C14.1 R17.8 R17.7 R17.6 R17.5 R18.2
  other v1: 7635,1505 7675,1505 6301.81,3890 6300.63,3975 6301.81,4065 7855,4320
EN_MOTOR: IC1.35 R17.3 U1.16 | length 1682.6
  Bottom Layer w10: U1.16 6804.06,944.41 6815.4,955.75 R17.3
  Bottom Layer w15: IC1.35 6440,2316.42 6405,2281.42 6405,1490 6640,1255 6640,1002.82 6698.41,944.41 U1.16
GND: *.6 *.9 C4.2 C5.2 C6.2 C7.2 C8.2 C9.2 C10.2 C11.2 C12.2 C13.2 C15.2 C16.2 C19.2 C23.2 C24.1 D1.2 EC1.2 J3.2 J5.2 J6.1 Jd1.3 Jd2.3 Jd3.3 L3.1 L5.1 L6.1 R6.1 R13.1 R14.1 R19.2 R20.2 R21.1 TPS1.2 U3.3 U3.6 | length 5211.7
  Top Layer w70: J6.1 3730,3861.01 3771.01,3820 ; 6110,3825 6175,3890 v1(6238.82,3890) 6225.91,3902.92 6225.91,3960.91 v1(6240,3975) ; 6225,3975 6225,4065 v1@6230,4070
  Top Layer w100: 3771.01,3820 3776.01,3825 6110,3825
  Bottom Layer w20: v1(2414.88,3420) 2414.88,3419.46 2421.06,3413.28 2421.06,3383.31 C16.2 ; J5.2 5987.6,2589.72 5936.89,2640.43 5936.89,3456.89 5974.06,3494.06 Jd2.3 5980,3420 6042,3358 6193,3358 ; Jd3.3 6215,3380 6200.53,3365.53 6473.81,3365.53 6500,3391.72 6500,3570 6375,3695 6329.95,3695 6264,3760.95 6264,3761 6238.82,3786.18 v1(6238.82,3890)
  other v1: 2835.16,3760 3081.89,3880 6238.82,4065
  other v3: 1850.3,3400.3 1889.7,3400.3 1850.3,3439.7 1889.7,3439.7
L_EH: P7.4 P8.4 U1.3 U4.2 | length 3067.3
  Top Layer w15: U4.2 1875.55,2239.45 2350,1765 2350,1266.16 2881.16,735 3350.3,735 3420.3,665 P7.4
  Bottom Layer w10: P8.4 6196.84,666.84 6239.53,666.84 6284.05,711.37 6331.37,711.37 6379,759 6379,851.63 6420.6,893.23 U1.3
L_EH_IN: IC1.38 R17.2 U1.17 | length 1581.4
  Top Layer w10: IC1.38 6795,1965 6795,960 6831.93,923.07 v1(6863.5,923.07)
  Bottom Layer w10: U1.17 6859.25,918.82 v1(6863.5,923.07) R17.2
L_PH: P7.8 P8.8 U1.2 U2.2 | length 3784.2
  Top Layer w15: v1(1775,2790) 1855,2790 1870.55,2774.45 U2.2
  Bottom Layer w10: P8.8 6307.63,665 6395,752.37 6395,845 6417.64,867.64 U1.2
  Bottom Layer w15: v1(1775,2790) 1750,2790 1680,2720 1680,2320 1786.83,2213.17 1796.83,2213.17 2335,1675 2335,1259.95 2874.95,720 3474.65,720 P7.8
L_PH_IN: IC1.40 R17.1 U1.18 | length 1522.6
  Top Layer w10: IC1.40 6700,1960 6700,1850 6775,1775 6775,935 6821.96,888.04 v1(6863.5,888.04)
  Bottom Layer w10: U1.18 6759.11,893.23 6858.31,893.23 v1(6863.5,888.04) R17.1
Light0: IC1.109 Jd1.2 | length 4611.1
  Bottom Layer w15: v1(3340,3880) 3340,4065 3410,4135 3535,4135 3565,4105 3565,3960 3800,3725 5855,3725 6060,3930 6330.58,3930 6525.58,3735 6945,3735 7130,3920 IC1.109
Light1: BL1.3 C29.2 C30.1 Jd3.2 R1.1 | length 3080.4
  Bottom Layer w20: Jd3.2 6215,3300 6185,3330 6055,3330 6020,3295 6020,3000 6328.07,2691.93 6532.46,2691.93 6600,2624.39 6600,2022.72 6599.47,2022.19 6599.47,1420.53 6615,1405 BL1.3 6662.03,1402.97 6702.03,1402.97 6744.14,1360.86 C29.2 6836.06,1361.18 6920.43,1361.18 C30.1 6961.49,1361.49 6977.91,1377.91 6977.91,1465 6926.73,1516.18 R1.1
Light2: BL1.4 Jd2.2 R2.1 | length 2829.7
  Bottom Layer w15: Jd2.2 5980,3000 6355,2625 6410,2625 6487.5,2547.5 6487.5,2282.5 6445,2240 6445,1520 BL1.4 6955,1305 7020.75,1370.75 R2.1
MOTOR_EN: P7.7 P8.7 U1.4 U2.3 U4.3 | length 6820
  Top Layer w15: U2.3 v1(1920.55,2794.45) ; U4.3 1925.55,2230.25 2381,1774.8 2381,1279 2894,766 3349,766 3393.03,721.97 3486.62,721.97 P7.7
  Bottom Layer w10: P8.7 6299.53,769.53 6299.53,794.78 6423.56,918.82 U1.4
  Bottom Layer w15: v1(1920.55,2794.45) 1885,2830 1750.5,2830 1655,2734.5 1655,2315.3 1778.14,2192.17 1782.83,2192.17 2305,1670 2305,1247.52 2862.52,690 3280,690 3380,590 3541.21,590 3580,628.79 3580,714.65 P7.7
Net*_1: *.1 C3.1 | length 331.5
  Bottom Layer w30: v1@1795,3326.45 v1(1795,3334.8) 1795,3455 1819.9,3479.9 1920.1,3479.9 1945.71,3454.29 1971.38,3454.29 1974.69,3450.98 C3.1
  other v1: 1795,3286.1
Net*_4: *.4 C12.1 R5.1 R6.2 | length 296.9
  Bottom Layer w20: v1(1985,3285) 1985,3258.5 2008.5,3235 2174.37,3235 2215.08,3275.71 2216.06,3275.71 2224.37,3284.02 R5.1
  other v1: 1940,3285 1940,3330 1985,3330 1940,3375 1985,3375
Net*_8: *.8 C3.2 D1.1 L10.1 | length 877.2
  Top Layer w45: D1.1 1615,3441.61 1615,3275 1658.5,3231.5 2011.81,3231.5 2050,3269.7 2050,3404.13 L10.1
  other v1: 2035.32,3450
NetBEEP1_2: BEEP1.2 J5.3 | length 163.5
  Bottom Layer w15: J5.3 6025,2773.99 BEEP1.2
NetC10_1: C10.1 TPS1.4 | length 170.7
  Bottom Layer w50: C10.1 2822.28,3370 v1(2842.4,3390.12)
NetC20_1: C20.1 D2.1 U2.8 | length 219.8
  Top Layer w25: U2.8 1820.55,3010.55 1853.11,3043.11 D2.1
  other v1: 1995,3040
NetC20_2: C20.2 D3.2 D4.1 P2.1 Q1.3 Q2.4 U2.6 | length 754.1
  Bottom Layer w30: v1(1920.55,2907.6) 1920.55,2985.55 1934.37,2999.37 C20.2 1934.37,3084.37 1975,3125 2390,3125 2420,3095 2420,3070 2442.46,3047.54
  other v1: 2720,2750 2765,2750 2810,2750 2720,2795 2765,2795 2810,2795 2720,2840 2765,2840 2810,2840 2665,2940 2710,2940 2755,2940 2440,2945 2485,2945 2530,2945 2665,2985 2710,2985 2755,2985 2440,2990 2485,2990 2530,2990 2665,3030 2710,3030 2755,3030 2440,3035 2485,3035 2530,3035
NetC21_2: C21.2 R19.1 | length 138.5
  Bottom Layer w30: R19.1 3095.31,3445.98 3125,3475.67 3125,3567.01 C21.2
NetC25_1: C25.1 D5.1 U4.8 | length 269.3
  Bottom Layer w20: C25.1 1859.69,2460.98 1824.62,2496.05 1824.62,2584.62 v1(1825,2585) 1825,2610 1840,2625 D5.1
NetC25_2: C25.2 D6.2 D7.1 P2.2 Q3.3 Q4.4 U4.6 | length 754.3
  Top Layer w20: v1(1920.32,2460) 1920.32,2460.54 1925.55,2465.78 U4.6 1925.55,2612.05 1940,2626.5 2365.11,2626.5 2425.32,2566.3 2445,2566.3 Q3.3
  Top Layer w50: Q4.4@2747.28,2443.11 Q4.4
  other v1: 2680,2400 2725,2400 2770,2400 2680,2445 2725,2445 2770,2445 2680,2490 2725,2490 2770,2490 2445,2545 2490,2545
NetC27_2: C27.2 C28.2 EC4.2 TPS2.2 | length 140.9
  Top Layer w30: 3046.49,3335.01 3119.83,3335.01 3137.4,3317.43 TPS2.2
  other v1: 3029.68,3280 3005,3305 3032.49,3335.01 3015,3360
NetC28_1: C28.1 TPS2.4 | length 98.5
  Bottom Layer w30: C28.1 3090.31,3365.98 3109.33,3385 3180,3385
  other v1: 3165,3370 3195,3370 3165,3405 3195,3405
NetF1_2: F1.2 POW2.1
  other v1: 1960,4350 2005,4350 2050,4350 1960,4395 2005,4395 2050,4395
NetJ3_3: J3.3 R15.2 | length 122.2
  Top Layer w25: J3.3 2457.91,3343.5 2467.66,3343.5 2495,3316.16 2495,3315.32 v1@2482.5,3302.82
  other v1: 2505,3280 2485,3300
NetJ5_1: J5.1 R36.1 | length 160
  Bottom Layer w15: J5.1 6062.4,2589.72 6092.68,2620 6194.69,2620 R36.1
NetJd1_1: Jd1.1 R26.1 | length 156.2
  Top Layer w30: R26.1 3316.56,3627.18 3316.56,3779.31 3317.25,3780 Jd1.1
NetJd2_1: Jd2.1 R28.1 | length 218.6
  Bottom Layer w15: Jd2.1 6080,3224.18 6055,3199.18 6055,3100 6070.31,3084.69 R28.1
NetJd3_1: Jd3.1 R30.1 | length 136.1
  Bottom Layer w15: R30.1 6245.98,3140.31 6256.79,3151.12 6256.79,3165.06 6315,3223.27 Jd3.1
NetL1_1: L1.1 L2.1 L4.1 SW2.2 SW2.3
  other v1: 1860,3940 1905,3940 1950,3940 1860,3985 1905,3985 1950,3985 1860,4030 1905,4030 1950,4030
NetL7_1: L7.1 L8.1 L9.1 SW7.1 SW7.2
  other v1: 2395,3935 2440,3935 2485,3935 2395,3980 2440,3980 2485,3980 2395,4025 2440,4025 2485,4025
NetLED1_2: LED1.2 R7.1
  other v1: 1601.06,2665
NetLED2_2: LED2.2 R8.1
  other v1: 1644.37,3765
NetLED6_2: LED6.2 R16.1
  other v1: 2175,3835.31
NetP1_8: P1.8 P1.9 R9.2 | length 1188.4
  Top Layer w15: P1.8 2713.11,1344.14 2718.21,1349.24 2749.56,1349.24 R9.2 2799.68,1359.68 2870,1430 2870,2090 2810,2150 2719.39,2150 2666.62,2097.23 P1.9
NetQ1_1: Q1.1 R22.1
NetQ2_1: Q2.1 R23.1
NetQ3_1: Q3.1 R24.1
NetQ4_1: Q4.1 R25.1
NetR18_1: R18.1 U1.11 U1.12 U1.13 U1.14 U1.15 | length 0
NetR20_1: R20.1 Rg1.3 U3.5 | length 802.6
  Top Layer w30: v1(2745.31,3850) 2755.31,3860 U3.5 2873.93,3860 2910,3896.07 2910,4105 2952.5,4147.5 3227.5,4147.5 3245,4130 Rg1.3
NetR22_2: R22.2 U2.7 | length 1507.4
  Top Layer w20: U2.7@1870.55,2939.09 U2.7 1869.86,2906.91 1869.86,2853.04 1865.11,2848.29 1809.03,2848.29 1770,2887.32 1770,3035 1860,3125 2535,3125 2575,3085 2575,2873.54 2515.55,2814.09 R22.2
NetR23_2: R23.2 U2.5 | length 1319.8
  Top Layer w15: U2.5 1970.55,2839.45 2025,2785 2025,2705 2053.82,2676.18 2408.11,2676.18 2412.95,2671.34 2931.34,2671.34 2955,2695 2955,2775 2970,2790 R23.2
NetR24_2: R24.2 U4.7 | length 907.6
  Top Layer w15: U4.7 1875.55,2620.55 1905,2650 2469.28,2650 2555,2564.28 2555,2498.54 2515.55,2459.09 R24.2
NetR25_2: R25.2 U4.5 | length 1524
  Top Layer w20: U4.5 1975.55,2499.45 2030,2445 2030,2330 2070,2290 3090,2290 3130,2330 3130,2387.68 3075.55,2442.13 R25.2
PGND: C2.2 C22.2 C26.2 D4.2 D7.2 EC2.2 EC3.2 F1.1 L3.2 L5.2 L6.2 POW1.1 Q2.3 Q4.3 R4.2 R7.2 R8.2 R16.2 U2.4 U4.4 | length 5969
  Top Layer w25: v2(1765,3135) 1771.76,3135 1796.76,3160 2570,3160 2625,3105 2805.27,3105 D4.2
  Top Layer w30: C22.2@1538.07,2537.05 C22.2
  Top Layer w40: Q4.3@3009.09,2532.87 Q4.3
  Top Layer w60: v1(2865.16,2620.57) 2921.4,2620.57 Q4.3@3009.09,2532.87
  Top Layer w80: D4.2 2986.56,3038.11 3033.43,2991.25 Q2.3 3033.43,2881.61 3042.64,2872.4 3148.14,2872.4 3195,2825.54 3195,2580 3148.14,2533.14 3029.04,2533.14 Q4.3
  Bottom Layer w25: v2(1765,3135) 1765,2940 1840,2865 1915,2865 1970.55,2809.45 v1(1970.55,2718.62)
  Bottom Layer w30: v1(1539.25,2538.24) R7.2 ; 1670,4070 1780,3960 1780,3815 ; R8.2 1705,3765.98 1754.02,3815 1780,3815 ; R16.2 2171.69,3777.99 2137.01,3777.99 2108.39,3806.61 2060.9,3806.61 2053.34,3814.17 1838.9,3814.17 L6.2 1837.52,3815 1780,3815
  Bottom Layer w40: 1650,4260.1 1655,4265.1 1849.1,4265.1 1864,4280 F1.1
  Bottom Layer w50: 1535,3315 1500,3280 1500,2704.25 R7.2
  Bottom Layer w80: POW1.1@1570,4344.36 POW1.1 ; EC3.2 1535,4025 1535,3315 1710,3140 v2@1760,3140
  other v1: 3440,4055
  other v2: 1685,3160
POWER: POW1.2 SW1.3 SW2.1 SW7.3 | length 1414.8
  Top Layer w80: SW1.3@1605,3025 1540,3090 1540,4167.51 1627.49,4255 1735,4255 1745,4265
  other v1: 1770,4120 1815,4120 1860,4120 2115,4120 2160,4120 2205,4120 1770,4165 1815,4165 1860,4165 2115,4165 2160,4165 2205,4165 1770,4210 1815,4210 1860,4210 2115,4210 2160,4210 2205,4210
RX14.1: IC1.68 J12.1 | length 980.6
  Top Layer w15: IC1.68 8050,2620 8235,2435 8235,1825 J12.1
RX15.6: IC1.64 J8.1 | length 539.7
  Top Layer w15: IC1.64 8160,2300 J8.1
RX33.13: IC1.31 J4.1 | length 763
  Top Layer w15: IC1.31 6385,2465 6385,1975 6470,1890 J4.1
S14: IC1.66 SW3.1 | length 1495.3
  Top Layer w15: SW3.1 7359.84,1570 7391.71,1601.87 7391.71,1611.71 7430,1650 7430,2230 7800,2600 7865,2600 7895,2570 7955,2570 7976,2549 7999.08,2549 8028.08,2520 IC1.66
S15: IC1.62 SW5.1 | length 1600.6
  Top Layer w15: SW5.1 7350,1420 7455,1525 7455,2220 7598.03,2363.03 7996.97,2363.03 IC1.62
Servo_PWM: J6.3 Jd1.4 R27.1 | length 1091.1
  Top Layer w30: R27.1 3009.02,3780.63 3005.71,3783.94 3005.71,3784.92 3005,3785.63 3005,3940 3050,3985 3556.26,3985 3633.4,4062.14 3633.4,4108.4 3675,4150 J6.3
  Top Layer w45: R27.1@3010,3780.31 Jd1.4 Jd1.4@3100,3779.92
T1: IC1.84 J7.1 | length 1278.5
  Bottom Layer w10: J7.1@7305.47,4210.47 J7.1 7399.47,4165.53 7399.47,3835.53 7770,3465 8000,3465 8040,3425 IC1.84
T2: IC1.83 J7.2 | length 1195.6
  Bottom Layer w10: J7.2 7383.47,4081.53 7383.47,3828.9 7767.37,3445 7915,3445 IC1.83
TFTCLK: IC1.61 J2.6 | length 1345.4
  Bottom Layer w10: IC1.61 7990,2370 8070,2370 8101,2401 8101,3226 8165,3290 8230,3290 8250.53,3310.53 8250.53,3384.47 8210,3425 J2.6
TFTCSO: IC1.60 J2.2 | length 904.4
  Bottom Layer w10: IC1.60 8080,2220 8140,2280 8140,2990 8175,3025 8185,3025 J2.2@8185,3035
TFTDC: IC1.58 J2.3 | length 1136.9
  Bottom Layer w10: IC1.58 8156,2236 8156,2806.39 8250.53,2900.92 8250.53,3082.44 8197.97,3135 J2.3@8185,3135
TFTMOSI: IC1.63 J2.5 | length 1082.5
  Bottom Layer w10: IC1.63 7985,2465 8055,2465 8085,2495 8085,3235 8175.61,3325.61 8200.61,3325.61 J2.5
TFTREST: IC1.59 J2.4 | length 1194.5
  Bottom Layer w10: IC1.59 7940,2225 7990,2275 8093.15,2275 8124,2305.85 8124,3204 8155,3235 J2.4@8185,3235
TX14.0: IC1.67 J12.2 | length 1077.9
  Top Layer w15: IC1.67 7990,2570 8060,2570 8210,2420 8210,1900 J12.2
TX15.7: IC1.65 J8.2 | length 723.2
  Top Layer w15: IC1.65 7995,2465 7995,2395 8020,2370 8050.85,2370 8139,2281.85 8139,2009 J8.2
TX33.12: IC1.30 J4.2 | length 934.9
  Top Layer w15: IC1.30 6487.5,2567.5 6487.5,2237.5 6430,2180 6430,1990 6460,1960 6580,1960 6645,1895 J4.2
V-SERVO: C19.1 C21.1 Rg1.1 Rg1.2 S1.2 U3.4 | length 988.6
  Top Layer w25: v1(2745.31,3770) 2745.31,3785.31 2770,3810 U3.4 U3.4@2835.45,3810.3
  Top Layer w30: U3.4 2915,3810 2940,3785 2940,3628.39 S1.2@2970.28,3598.11 ; U3.4@2835.45,3810.3 2900.3,3810.3 2960,3870 2960,4060 2980,4080 Rg1.1 Rg1.2 ; S1.2@2965.28,3598.11 S1.2@2983.39,3580
  other v1: 2982.48,3555.32 3027.48,3555.32 2982.48,3600.32 3027.48,3600.32
V_FUTUBA: J6.2 R27.2 S1.1 | length 1123.4
  Top Layer w30: R27.2 3090,3720 3145.63,3664.37 ; S1.1@3161.61,3580 3145.63,3595.98 3145.63,3664.37 ; J6.2 3705,4050 3599.93,3944.93 3204.93,3944.93 3145.63,3885.63 3145.63,3664.37
VCC3.3_all: C17.2 C18.2 EC4.1 P1.4 R9.1 R10.1 R11.1 R12.1 R26.2 R29.2 R31.2 TPS2.5 | length 6595.4
  Top Layer w30: P1.4@2655.56,1746.46 2680.79,1746.46 2754.02,1819.69 R10.1 2757.74,1822.43 2802.43,1822.43 2820,1840 ; v1(2755,2024.68) 2758.31,2021.38 2802.43,2021.38 2820,2003.8 2820,1840 ; R9.1@2756.69,1417.01 R9.1 2760.98,1420.31 2820,1479.33 2820,1603.15 2770,1653.15 2820,1703.15 2820,1840 ; R11.1 R11.1@2763.31,1657.99
  Top Layer w50: EC4.1 3074.88,3410.12 3139.76,3475 3255,3475 3315,3535 R26.2 v2(3445.71,3565)
  Bottom Layer w40: v2(3445.71,3565) 3448.42,3565 3498.42,3615 6049.69,3615 ; R29.2 6049.69,3615 ; R31.2 6234.69,3600.32 6199.71,3635.29 6069.98,3635.29 6049.69,3615
  Bottom Layer w50: v1(2755,2024.68) 2759.68,2020 2813.21,2020 2842.5,2049.29 2842.5,2157.5 2950,2265 3170,2265 3235,2330 3235,2540 3310,2615 3505,2615 3570,2680 3570,3235 3445.71,3359.29 v2(3445.71,3565)
VCC3.3_ITEM: C15.1 C16.1 J1.17 J1.18 J3.5 | length 6502
  Top Layer w15: J1.18 7640.04,4270.04 7659.72,4289.72 J1.17
  Top Layer w25: v1(2480,3375) 2480,3422.71 2514.69,3457.4 J3.5@2516.28,3457.4 ; 2515.59,3539.41 2515.59,3458.09 J3.5@2516.28,3457.4 ; J3.5 J3.5@2516.28,3457.4
  Top Layer w40: J3.5 2532.6,3457.4 2566.87,3423.13 2566.87,3223.13 2635,3155 3695,3155 3780,3240 3780,3555 3820,3595 6315,3595 6820,4100 7396.57,4100 7440,4143.43 7440,4350 7470,4380 7625,4380 7648.43,4356.57
  other v1: 2495.63,3540
VCC3.3_MCU: EC1.1 IC1.2 IC1.4 J2.1 J2.7 J7.4 TPS1.5 | length 7981.4
  Top Layer w25: J7.4 7035,4235 7035,4240 7145,4350 7305,4350 7373.5,4418.5 8067.29,4418.5 8150,4335.79 8150,3595 J2.7 8155,3480 8155,2965 J2.1@8185,2935
  Top Layer w35: TPS1.5 2766.06,3390.12 2725,3349.05 2725,3255 2765,3215 3670,3215 3725,3270 3725,3605 3770,3650
  Top Layer w40: 3770,3650 6280,3650 6536.35,3906.35 6536.35,3916.35 IC1.4 IC1.2 6695,4175 6975.16,4175 7030,4229.84 J7.4
  Top Layer w50: EC1.1 2747.6,3410.12 TPS1.5
VCC5.0-ALL: BEEP1.1 BL1.1 C1.2 C6.1 C7.1 C8.1 C9.1 C11.1 C13.1 C14.2 C27.1 J3.1 J4.4 J8.4 J12.4 L10.2 R1.2 R2.2 R5.2 R15.1 R28.2 R30.2 TPS1.1 TPS1.3 TPS2.1 TPS2.3 U1.20 | length 10830.2
  Top Layer w60: 3194.49,3274.77 3599.77,3274.77 3650,3325 3650,3670 3705,3725 v2(6230,3725) 6255,3725 v2(6310,3780)
  Bottom Layer w25: U1.20 6745.43,842.05 6787.48,800 C14.2
  Bottom Layer w35: R28.2 6105.81,3144.51 6140.68,3144.51 6205.5,3079.68 R30.2 6245.98,3079.68 6246.79,3078.88 6246.79,3077.89 6255,3069.68 6255,3005 6218.73,2968.73 BEEP1.1
  Bottom Layer w40: 2907.28,3215 3055,3215 3060,3220 ; v1(3090.31,3280) 3090.31,3250.31 3060,3220 ; v1@3184.77,3274.77 3184.77,3240 3164.77,3220 3060,3220
  Bottom Layer w45: BL1.1 6802.87,1605 C1.2 R2.2 7068.64,1577.12 7095,1550.76 7095,1365 6995,1265 6995,770 6963.48,738.48 6896.52,738.48 6864.69,770.31 C14.2
  Bottom Layer w50: 2405,3275 2460,3220 2650.71,3220 ; v1(2767.6,3279.88) 2767.48,3280 C9.1 2680,3249.29 2650.71,3220 ; v1(2847.4,3274.88) 2907.28,3215 2650.71,3220
  Bottom Layer w60: R30.2 6251.32,3086.01 6471.01,3086.01 6585,3200 6595,3210 ; v2(6310,3780) 6410,3780 6595,3595 6595,3210 ; C1.2 6845,1591.38 J4.4 6845,2040 6820,2065 ; J12.4 7865,1925 J8.4 7590,1930 7455,2065 6820,2065 ; 6595,3210 6595,2700 6665,2630 6665,2220 6820,2065
  other v1: 3180,3265 2290,3285 2335,3285 3200,3285 2380,3290 2425,3290 2290,3330 2335,3330 2290,3375 2335,3375 2290,3440 2335,3440 2385,3465 2430,3465 2290,3485 2335,3485 2290,3530 2335,3530
VCC11.2: *.7 C4.1 C5.1 C23.1 C24.2 EC3.1 L1.2 L2.2 L4.2 LED2.1 U3.1 U3.2 | length 995.9
  Top Layer w80: EC3.1 1720,3903.15 LED2.1 ; 2075,3645 2081,3639 2828.9,3639 2835.16,3645.26 U3.1
  other v1: 2760,3515 2805,3515 2850,3515 2760,3560 2805,3560 2850,3560 1740,3600 1785,3600 1830,3600 1875,3600 1920,3600 1965,3600 2760,3605 2805,3605 2850,3605 1740,3645 1785,3645 1830,3645 1875,3645 1920,3645 1965,3645 2760,3650 2805,3650 2850,3650 1740,3690 1785,3690 1830,3690 1875,3690 1920,3690 1965,3690 2760,3695 2805,3695 2850,3695
VCC11.2-M: C22.1 C26.1 D2.2 D3.1 D5.2 D6.1 LED1.1 Q1.4 Q3.4 SW1.1 SW1.2 U2.1 U4.1 | length 300.7
  Top Layer w50: LED1.1 1725.71,2665 1755,2635.71 1755,2435 1750,2440 1745,2440
  other v1: 1725,2350 1770,2350 1815,2350 1725,2395 1770,2395 1815,2395 2160,2420 2205,2420 2250,2420 1725,2440 1770,2440 1815,2440 2160,2465 2205,2465 2250,2465 2160,2510 2205,2510 2250,2510 1720,2655 1765,2655 1810,2655 1720,2700 1765,2700 1810,2700 1765,2745 1810,2745 2165,2775 2210,2775 2255,2775 2165,2820 2210,2820 2255,2820 2165,2865 2210,2865 2255,2865 2075,3020 2120,3020 2305,3020 2350,3020 2075,3065 2120,3065 2305,3065 2350,3065
VCC11.2_Edge: EC2.1 L7.2 L8.2 L9.2 LED6.1 POW2.2 R3.1 | length 1765.2
  Top Layer w25: 2585,4250 2840,4250 2900,4190 3384.69,4190 3432.89,4141.79 3433.88,4141.79 3439.69,4135.98 R3.1
  Top Layer w80: POW2.2 2369.48,4338.94 2496.06,4338.94 2585,4250 EC2.1
  Bottom Layer w80: 2480,3745 2558.14,3745 2585,3771.86 EC2.1
  other v1: 2275,3710 2320,3710 2365,3710 2410,3710 2455,3710 2500,3710 2275,3755 2320,3755 2365,3755 2410,3755 2455,3755 2500,3755
pads on no net: *.2 *.3 *.5 IC1.13 IC1.15 IC1.17 IC1.32 IC1.34 IC1.36 IC1.77 IC1.94 IC1.107 J1.0 J1.5 J3.4 P1. R17.4 SW4.0 U1.5 U1.6 U1.7 U1.8 U1.9
copper on no net:
  other v4: 3720.59,665.47 6004.06,665.47

## Polygon pours and split planes (outlines as drawn)
DGND on Top Layer "Top Layer-DGND" (solid, remove dead copper, pour order 39): 3375,1205 3718.22,1205 3724.64,1205 cw(c3724.64,1119.64) 3785,1180 3788.93,1176.07 cw(c3718.22,1105.36) 3818.22,1105.36 3818.22,1105 3818.22,280 cw(c3718.22,280) 3718.22,180 3241.71,180 cw(c3241.71,181.03) 3240.68,181.03 2190,1095 1555,1090 cw(c1555,1190) 1455,1190 1455,2320 3375,2310
DGND on Top Layer "NONET_L01_P033" (solid, remove dead copper, pour order 33): 8170,4445 cw(c8170,4345) 8270,4345 8270,1190 cw(c8180,1190) 8180,1100 8080,1100 7535,1105 6484.32,191.03 6006.78,190 cw(c6006.78,290) 5906.78,290 5906.78,1115 cw(c6006.78,1115) 6006.78,1215 6350,1215 6350,2525 6275,2525 6270,4225 6735,4225 7287.48,4445
GND on Top Layer "Top Layer-GND" (solid, remove dead copper, pour order 19): 1830,3105 1589.14,3337.43 1600,3800 2515,3790 2515,4015 3820,4005 3820,3860 5900,3855 5900,4125 cw(c6000,4125) 6000,4225 6270,4225 6275,2525 6000,2525 cw(c6000,2615) 5910,2615 5900,3540 3820,3540 3820,2625 cw(c3720,2625) 3720,2525 3375,2525 3370,3100
PGND on Top Layer "f" (solid, remove dead copper, pour order 13): 3000,4220 2440,4440 1545,4440 ccw(c1545,4350) 1455,4350 1455,2325 3375,2315 3370,3100 1830,3105 1589.14,3337.43 1600,3800 2515,3790 2515,4015 3820,4005 3820,4125 ccw(c3725,4125) 3725,4220
DGND on Bottom Layer "Bottom Layer-No Net" (solid, remove dead copper, pour order 37): 3375,1210 3718.22,1210 3724.64,1210 cw(c3724.64,1124.64) 3785,1185 3788.93,1181.07 cw(c3718.22,1110.36) 3818.22,1110.36 3818.22,1110 3818.22,285 cw(c3718.22,285) 3718.22,185 3241.71,185 cw(c3241.71,186.03) 3240.68,186.03 2190,1100 1555,1095 cw(c1555,1195) 1455,1195 1455,2325 3375,2315
DGND on Bottom Layer "DGND_L02_P031" (solid, remove dead copper, pour order 31): 8170,4445 cw(c8170,4345) 8270,4345 8270,1190 cw(c8180,1190) 8180,1100 8080,1100 7535,1105 6484.32,191.03 6006.78,190 cw(c6006.78,290) 5906.78,290 5906.78,1115 cw(c6006.78,1115) 6006.78,1215 6350,1215 6350,2525 6275,2525 6270,4225 6735,4225 7287.48,4445
PGND on Bottom Layer "f" (solid, remove dead copper, pour order 23): 3005,4220 2445,4440 1550,4440 ccw(c1550,4350) 1460,4350 1460,2325 3380,2315 3375,3100 1835,3105 1594.14,3337.43 1605,3800 2520,3790 2520,4015 3825,4005 3825,4125 ccw(c3730,4125) 3730,4220
GND on Bottom Layer "Top Layer-No Net 1" (solid, remove dead copper, pour order 21): 1830,3105 1589.14,3337.43 1600,3800 2515,3790 2515,4015 3820,4005 3820,3860 5900,3855 5900,4125 cw(c6000,4125) 6000,4225 6270,4225 6275,2525 6000,2525 cw(c6000,2615) 5910,2615 5900,3540 3820,3540 3820,2625 cw(c3720,2625) 3720,2525 3375,2525 3370,3100

## Other copper
Top Layer:
  rectangle net NetQ2_1: 3045,2675 3096.42,2821.1
  rectangle net POWER: 1695,4215 1885,4425
  rectangle net PGND: 1500.55,2503.62 1695,2575
  rectangle net POWER: 1510,2990 1705,3076.42
  rectangle net VCC3.3_all: 2723.9,1555.75 2786.1,1669.25
  rectangle net VCC11.2-M: 1640,2640 1715,2845
  rectangle net VCC11.2-M: 1670,2635 1834.53,2771.77
  rectangle net VCC11.2-M: 1505,2753.58 1705,2975
  rectangle net NetC20_1: 1934.37,3019.68 2015,3060
  rectangle net NetC20_2: 2640,2845 2775,3080
  rectangle net NetC20_2: 2410,2870 2540,3085
  rectangle net NetQ4_1: 2980,2325 3040,2465
  rectangle net NetQ1_1: 2420,2705 2485,2840
  rectangle net NetQ3_1: 2415,2345 2475,2480
  rectangle net VCC11.2-M: 1520,2325 1840,2475
  rectangle net VCC5.0-ALL: 3160,3250 3220,3305
  rectangle net NetC28_1: 3145,3355 3215,3420
  rectangle net NetC27_2: 2915,3250.01 3055,3350
  rectangle net VCC5.0-ALL: 3065,3255 3115,3305
  rectangle net V-SERVO: 2949.05,3518.9 3040.2,3631.18
  rectangle net VCC3.3_ITEM: 2475,3510 2545,3575
  rectangle net NetF1_2: 2090,4285 2240,4420.2
  rectangle net NetF1_2: 1922,4320 2240,4420.2
  rectangle net VCC11.2: 2720,3470 2885,3725
  rectangle net NetJ3_3: 2470,3258.9 2525.43,3320
  rectangle net VCC5.0-ALL: 2355,3440 2460,3490
  rectangle net VCC5.0-ALL: 2270,3250 2460,3325
  rectangle net VCC5.0-ALL: 2260,3250 2375,3575
  rectangle net Net*_4: 1925,3260 2000,3395
  rectangle net Net*_8: 1635,3460 1810,3575
  rectangle net VCC11.2_Edge: 2133,3685 2535,3785
  rectangle net VCC11.2: 1820,3475 1870,3620
  rectangle net VCC11.2: 1695,3585 2100,3780
  rectangle net NetL7_1: 2245,3800 2510,4090
  rectangle net NetL1_1: 1815,3790.55 2085.75,4095
  rectangle net POWER: 1720,4105 2415,4235
Bottom Layer:
  rectangle net NetC25_2: 2975,2690 3455,2860
  rectangle net NetC25_2: 2975,2355 3155,2860
  rectangle net NetC25_2: 2865,2340 3130,2550
  rectangle net NetC20_2: 2715,2900 3455,3075
  rectangle net NetC25_2: 2635,2335 2900,2550
  rectangle net VCC11.2-M: 1695,2325 1825,2470
  rectangle net VCC11.2-M: 1740,2325 2135,2420
  rectangle net NetC25_2: 2405,2500 2800,2675
  rectangle net NetC20_2: 2410,2880 2775,3080
  rectangle net NetC20_2: 2640,2685 2905,2900
  rectangle net VCC11.2-M: 2055,2160 2365.11,3095
  rectangle net PGND: 1480,4030 1675,4430
  rectangle net VCC5.0-ALL: 3160,3250 3220,3305
  rectangle net NetC28_1: 3145,3355 3215,3420
  rectangle net NetC27_2: 2990,3260 3050,3385
  rectangle net VCC5.0-ALL: 2825,3250 2885,3305